# Altium PCB Copy of PCB1.PcbDoc
Units mil, origin at the board's own origin, x right, y up, seen from the top; angles counter-clockwise.
Board outline 6000 x 4000 mil, 10 copper layers (Top Layer 1, Top Layer, Layer 5, Layer 3, Layer 1, Layer 2, Layer 4, Layer 6, Bottom Layer, Bottom Layer 1), stack 48.824 mil thick; 53 components, 189 nets, 458 pads, 0 vias.
Unrouted connection lines stored in the file: 253.
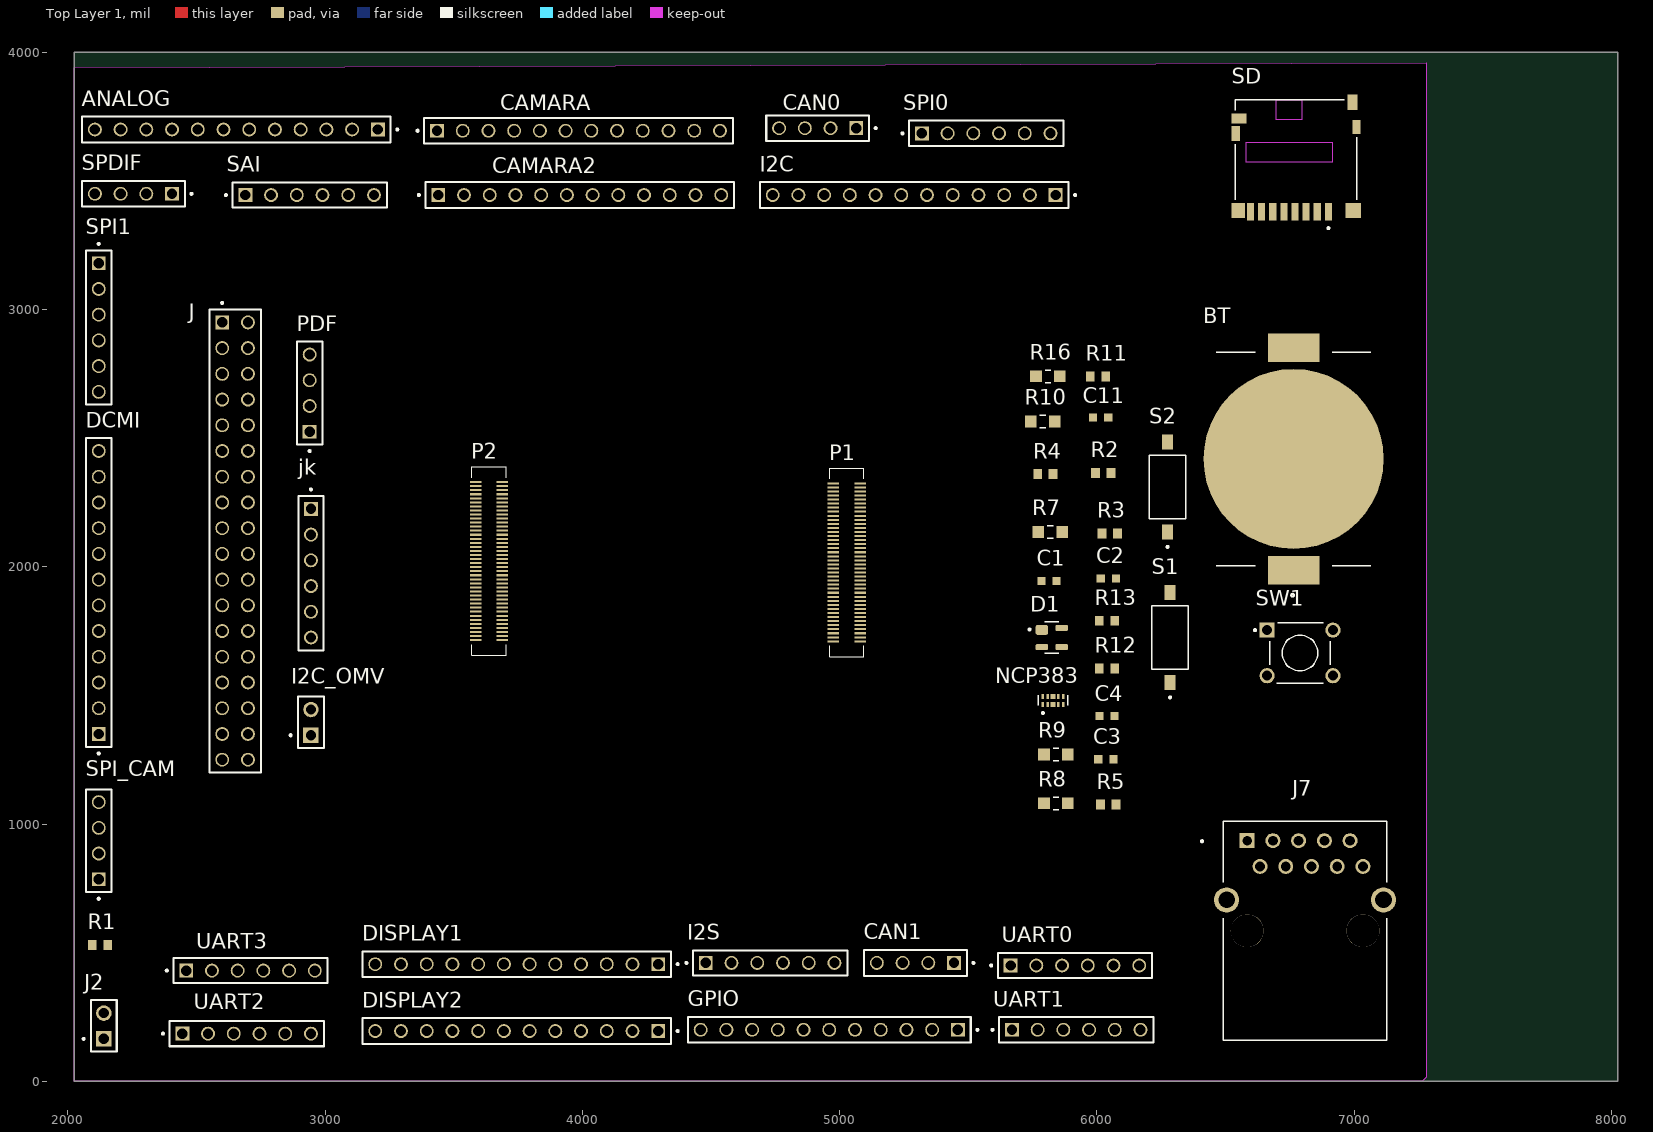
[diagram p0: Top Layer 1 view]
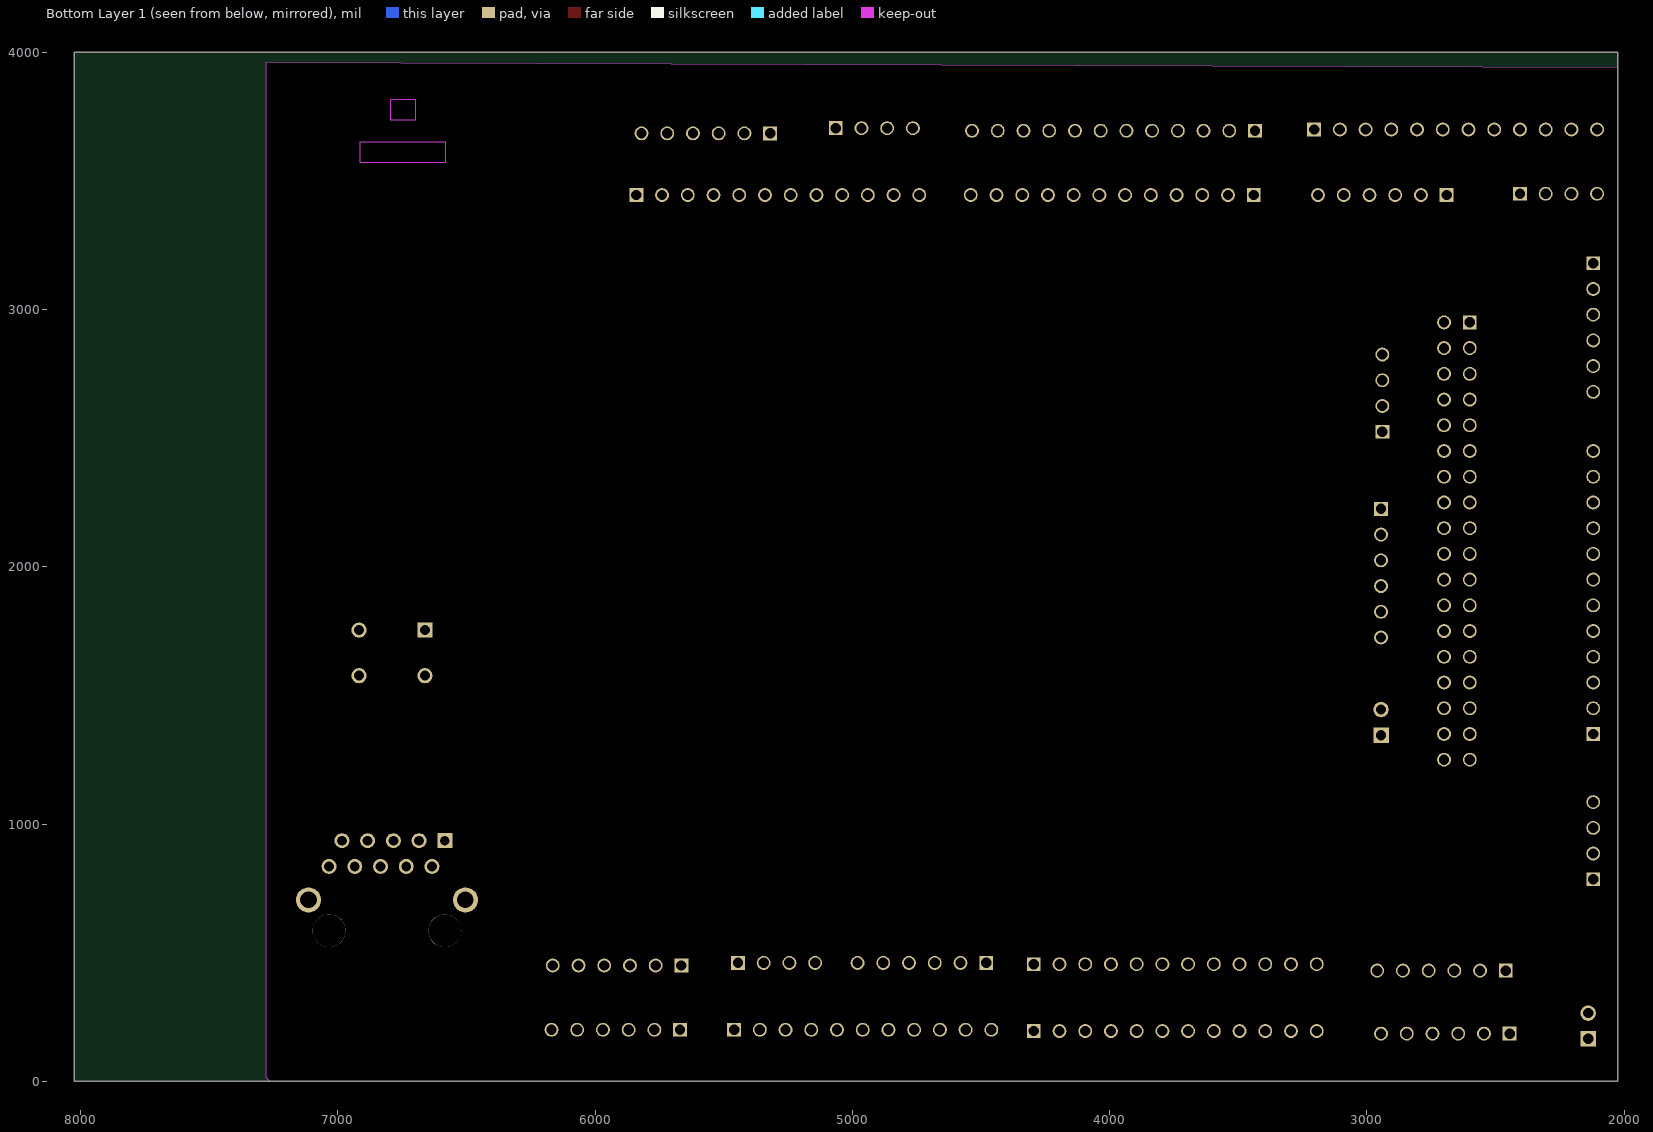
[diagram p1: Bottom Layer 1 view, seen from below]

## Layer stack, top to bottom
Top Solder: solder mask 0.4, Solder Resist, Dk 3.5
Top Layer 1: signal copper 1.378
Dielectric 4: prepreg 2.8, PP-006, Dk 4.1
Top Layer: signal copper 1.4
Dielectric 2: prepreg 2.8, PP-006, Dk 4.1
Layer 5: signal copper 1.378
Dielectric 8: prepreg 2.8, PP-006, Dk 4.1
Layer 3: signal copper 1.378
Dielectric 6: prepreg 2.8, PP-006, Dk 4.1
Layer 1: signal copper 1.378
Dielectric 1: dielectric 12.6, FR-4, Dk 4.8
Layer 2: signal copper 1.378
Dielectric 7: prepreg 2.8, PP-006, Dk 4.1
Layer 4: signal copper 1.378
Dielectric 9: prepreg 2.8, PP-006, Dk 4.1
Layer 6: signal copper 1.378
Dielectric 3: prepreg 2.8, PP-006, Dk 4.1
Bottom Layer: signal copper 1.4
Dielectric 5: prepreg 2.8, PP-006, Dk 4.1
Bottom Layer 1: signal copper 1.378
Bottom Solder: solder mask 0.4, Solder Resist, Dk 3.5

## Board outline
2025,0 8025,0 8025,4000 2025,4000
cut-out: 7280,3960 7280,15 7265,0 2025,0 2025,3940

## Design rules (kind name [scope] priority, off if disabled: settings)
Clearance [All] p1: gap=5 ignorepadtopadclearanceinfootprint=FALSE
DiffPairsRouting [All] p1: maxlimit=10 minlimit=10 mostfreqgap=10 toplayer_minwidth=5 toplayer_maxwidth=15 toplayer_prefwidth=5 midlayer1_minwidth=5 midlayer1_maxwidth=15 midlayer1_prefwidth=5 midlayer2_minwidth=5 midlayer2_maxwidth=15 midlayer2_prefwidth=5 midlayer3_minwidth=5 midlayer3_maxwidth=15 midlayer3_prefwidth=5 midlayer4_minwidth=5 midlayer4_maxwidth=15 midlayer4_prefwidth=5 midlayer5_minwidth=5 midlayer5_maxwidth=15 midlayer5_prefwidth=5 midlayer6_minwidth=5 midlayer6_maxwidth=15 midlayer6_prefwidth=5 midlayer7_minwidth=5 midlayer7_maxwidth=15 midlayer7_prefwidth=5 midlayer8_minwidth=5 midlayer8_maxwidth=15 midlayer8_prefwidth=5 bottomlayer_minwidth=5 bottomlayer_maxwidth=15 bottomlayer_prefwidth=5 maxuncoupledlength=500
PolygonConnect [All] p1: connectstyle=Relief reliefconductorwidth=10 reliefentries=4 polygonreliefangle="90 Angle" airgapwidth=10
RoutingVias [All] p1: holewidth=28 width=50 viastyle="Through Hole" minholewidth=28 minwidth=50 maxholewidth=28 maxwidth=50
SolderMaskExpansion [All] p1: expansion=4 istentingtop=FALSE
Width [All] p1: maxlimit=40 minlimit=5 preferedwidth=10
29 further rules are at their usual default settings.

## Classes and differential pairs
differential pair USB1_D: +USB1_D_P -USB1_D_N
differential pair USB0_D: +USB0_D_P -USB0_D_N
differential pair ETH_D: +ETH_D_P -ETH_D_N
differential pair ETH_C: +ETH_C_P -ETH_C_N
differential pair ETH_B: +ETH_B_P -ETH_B_N
differential pair ETH_A: +ETH_A_P -ETH_A_N
differential pair DSI_D3: +DSI_D3_P -DSI_D3_N
differential pair DSI_D2: +DSI_D2_P -DSI_D2_N
differential pair DSI_D1: +DSI_D1_P -DSI_D1_N
differential pair DSI_D0: +DSI_D0_P -DSI_D0_N
differential pair DSI_CK: +DSI_CK_P -DSI_CK_N
differential pair DS1_D2: +DS1_D2_P -DS1_D2_N
differential pair DS1_CK: +DS1_CK_P -DS1_CK_N
differential pair CK: +CK_P -CK_N
differential pair CAM_D3: +CAM_D3_P -CAM_D3_N
differential pair CAM_D2: +CAM_D2_P -CAM_D2_N
differential pair CAM_D1: +CAM_D1_P -CAM_D1_N
differential pair CAM_D0: +CAM_D0_P -CAM_D0_N

## Components (designator, comment, footprint, x,y, rotation, side; value= is the part's Value field where it differs from the comment)
ANALOG "TSW-112-05-S-S" SAMTEC_TSW-112-05-S-S 3205,3700 r180 top
BT "BK-912-TR" MPD_BK-912-TR 6765,2419.2 r90 top
C1 "885012206071" WCAP-CSGP_885012206071 5814.53,1945 r0 top
C2 "885012206071" WCAP-CSGP_885012206071 6045,1955 r0 top
C3 "885012206071" WCAP-CSGP_885012206071 6035,1251.61 r0 top
C4 "885012206071" WCAP-CSGP_885012206071 6040,1420 r0 top
C11 "885012206071" WCAP-CSGP_885012206071 6015,2580 r0 top
CAMARA "TSW-112-05-S-S" SAMTEC_TSW-112-05-S-S 3435,3695 r0 top
CAMARA2 "TSW-112-05-S-S" SAMTEC_TSW-112-05-S-S 3440,3445 r0 top
CAN0 "TSW-104-24-G-S" SAMTEC_TSW-104-24-G-S 5065,3705 r180 top
CAN1 "TSW-104-24-G-S" SAMTEC_TSW-104-24-G-S 5445,460 r180 top
D1 "PRTR5V0U2X" SOT190P230X110-4N 5825,1725 r0 top
DCMI "TSW-112-05-S-S" SAMTEC_TSW-112-05-S-S 2120,1350 r90 top
DISPLAY1 "TSW-112-05-S-S" SAMTEC_TSW-112-05-S-S 4295,455 r180 top
DISPLAY2 "TSW-112-05-S-S" SAMTEC_TSW-112-05-S-S 4295,195 r180 top
GPIO "MTSW-111-22-T-S-440" SAMTEC_MTSW-111-22-T-S-440 4960,200 r0 top
I2C "TSW-112-05-S-S" SAMTEC_TSW-112-05-S-S 5840,3445 r180 top
I2C_OMV "DW-01-X-X-D-X" SAMTEC_DW-01-X-X-D-X 2945,1395 r0 top
I2S "HTSW-106-07-S-S-LL" SAMTEC_HTSW-106-07-S-S-LL 4730,460 r180 top
J "TSW-118-15-G-D" SAMTEC_TSW-118-15-G-D 2600,2950 r270 top
J2 "DW-01-X-X-D-X" SAMTEC_DW-01-X-X-D-X 2140,215 r0 top
J7 "SS64100-042F" BEL_SS64100-042F 6809.58,585 r0 top
jk "HTSW-106-07-S-S-LL" SAMTEC_HTSW-106-07-S-S-LL 2945,1975 r90 top
NCP383 "SZESD7104MUTAG" DIO_SZESD7104MUTAG 5829.68,1480.75 r90 top
P1 "DF40C-80DS-0.4V(51)" HRS_DF40C-80DS-0.4V(51) 5028.03,2017.09 r90 top
P2 "DF40C-80DS-0.4V(51)" HRS_DF40C-80DS-0.4V(51) 3636.97,2022.09 r90 top
PDF "TSW-104-24-G-S" SAMTEC_TSW-104-24-G-S 2940,2525 r90 top
R1 "CRCW06030000ZSTA" RESC1508X50N 2125.12,530 r0 top
R2 "CRCW06030000ZSTA" RESC1508X50N 6025,2365 r0 top
R3 "CRCW06030000ZSTA" RESC1508X50N 6050,2130 r0 top
R4 "CRCW06030000ZSTA" RESC1508X50N 5800,2360 r0 top
R5 "CRCW06030000ZSTA" RESC1508X50N 6044.88,1075 r0 top
R7 "ERJS06J104V" RES_ERJS06J104V 5818.74,2135 r0 top
R8 "ERJS06J104V" RES_ERJS06J104V 5841.26,1080 r0 top
R9 "ERJS06J104V" RES_ERJS06J104V 5841.26,1270 r0 top
R10 "ERJS06J104V" RES_ERJS06J104V 5790,2565 r0 top
R11 "CRCW06030000ZSTA" RESC1508X50N 6005.12,2740 r0 top
R12 "CRCW06030000ZSTA" RESC1508X50N 6040,1605 r0 top
R13 "CRCW06030000ZSTA" RESC1508X50N 6040.12,1790 r0 top
R16 "ERJS06J104V" RES_ERJS06J104V 5810,2740 r0 top
S1 "KAE01SGGT" SW_KAE01SGGT 6285,1725 r90 top
S2 "KAE01SGGT" SW_KAE01SGGT 6275,2310 r90 top
SAI "HTSW-106-07-S-S-LL" SAMTEC_HTSW-106-07-S-S-LL 2940,3445 r180 top
SD "1140084168" AMPHENOL_1140084168 6774.41,3414.53 r0 top
SPDIF "TSW-104-24-G-S" SAMTEC_TSW-104-24-G-S 2405,3450 r180 top
SPI0 "HTSW-106-07-S-S-LL" SAMTEC_HTSW-106-07-S-S-LL 5570,3685 r180 top
SPI1 "HTSW-106-07-S-S-LL" SAMTEC_HTSW-106-07-S-S-LL 2120,2930 r90 top
SPI_CAM "TSW-104-24-G-S" SAMTEC_TSW-104-24-G-S 2120,785 r90 top
SW1 "1825910-6" SW_1825910-6-4 6790,1665 r0 top
UART0 "HTSW-106-07-S-S-LL" SAMTEC_HTSW-106-07-S-S-LL 5915,450 r180 top
UART1 "HTSW-106-07-S-S-LL" SAMTEC_HTSW-106-07-S-S-LL 5920,200 r180 top
UART2 "HTSW-106-07-S-S-LL" SAMTEC_HTSW-106-07-S-S-LL 2695,185 r180 top
UART3 "HTSW-106-07-S-S-LL" SAMTEC_HTSW-106-07-S-S-LL 2710,430 r180 top

## Footprints (in the part's own frame and the unit in brackets; to place one, negate y for a bottom-side part, rotate by r counter-clockwise, add the part's x,y. Pads: shape width x height; smd on the part's side, far side on the other; paste and mask are expansions set on the pad)
AMPHENOL_1140084168 [mm]
  rect 0.7x1.75 smd: 1(3.2,-0.875) 2(2.1,-0.875) 3(1,-0.875) 4(-0.1,-0.875) 5(-1.2,-0.875) 6(-2.3,-0.875) 7(-3.4,-0.875) 8(-4.5,-0.875)
  rect 1x1.55 smd: 9(5.575,9.925)
  rect 1.45x1 smd: 10(-5.625,8.35)
  rect 1.5x1.5 smd: S1(5.65,-0.75)
  rect 1.3x1.5 smd: S2(-5.7,-0.75)
  rect 0.8x1.4 smd: S3(5.975,7.5)
  rect 0.8x1.5 smd: S4(-5.95,6.85)
  Keep-Out Layer region: 3.6,4 -4.9,4 -4.9,6 3.6,6
  Keep-Out Layer region: 0.55,8.2 -1.95,8.2 -1.95,10.2 0.55,10.2
  silkscreen extent -5.97,-2.6 5.97,10.2, body extent -6.02,-11.5 5.99,0.15
BEL_SS64100-042F [mm]
  rect 1.478x1.478 hole 0.97: 1(-5.715,8.89)
  round 1.478 hole 0.97: 2(-4.445,6.35) 3(-3.175,8.89) 4(-1.905,6.35) 5(-0.635,8.89) 6(0.635,6.35) 7(1.905,8.89) 8(3.175,6.35) 9(4.445,8.89) 10(5.715,6.35)
  round 2.475 hole 1.65: S1(-7.745,3.05) S2(7.745,3.05)
  round 3.25 hole 3.25 unplated: ""(-5.715,0) ""(5.715,0)
  silkscreen extent -10.27,-10.8 8.07,10.79, body extent -8,0 8,21.03, height 13.67
DIO_SZESD7104MUTAG [mm]
  rect 0.5x0.25 smd mask+0.05: 1(-0.4,1) 2(-0.4,0.5) 4(-0.4,-0.5) 5(-0.4,-1) 6(0.4,-1) 7(0.4,-0.5) 9(0.4,0.5) 10(0.4,1)
  rect 0.5x0.45 smd mask+0.05: 3(-0.4,0) 8(0.4,0)
  silkscreen extent -1.35,-1.44 0.5,1.44, body extent -0.5,-1.25 0.5,1.25, height 0.55
HRS_DF40C-80DS-0.4V(51) [mm]
  rect 0.2x1.14 smd: 1(-7.8,-1.32) 2(-7.8,1.32) 3(-7.4,-1.32) 4(-7.4,1.32) 5(-7,-1.32) 6(-7,1.32) 7(-6.6,-1.32) 8(-6.6,1.32) 9(-6.2,-1.32) 10(-6.2,1.32) 11(-5.8,-1.32) 12(-5.8,1.32) 13(-5.4,-1.32) 14(-5.4,1.32) 15(-5,-1.32) 16(-5,1.32) 17(-4.6,-1.32) 18(-4.6,1.32) 19(-4.2,-1.32) 20(-4.2,1.32) 21(-3.8,-1.32) 22(-3.8,1.32) 23(-3.4,-1.32) 24(-3.4,1.32) 25(-3,-1.32) 26(-3,1.32) 27(-2.6,-1.32) 28(-2.6,1.32) 29(-2.2,-1.32) 30(-2.2,1.32) 31(-1.8,-1.32) 32(-1.8,1.32) 33(-1.4,-1.32) 34(-1.4,1.32) 35(-1,-1.32) 36(-1,1.32) 37(-0.6,-1.32) 38(-0.6,1.32) 39(-0.2,-1.32) 40(-0.2,1.32) 41(0.2,-1.32) 42(0.2,1.32) 43(0.6,-1.32) 44(0.6,1.32) 45(1,-1.32) 46(1,1.32) 47(1.4,-1.32) 48(1.4,1.32) 49(1.8,-1.32) 50(1.8,1.32) 51(2.2,-1.32) 52(2.2,1.32) 53(2.6,-1.32) 54(2.6,1.32) 55(3,-1.32) 56(3,1.32) 57(3.4,-1.32) 58(3.4,1.32) 59(3.8,-1.32) 60(3.8,1.32) 61(4.2,-1.32) 62(4.2,1.32) 63(4.6,-1.32) 64(4.6,1.32) 65(5,-1.32) 66(5,1.32) 67(5.4,-1.32) 68(5.4,1.32) 69(5.8,-1.32) 70(5.8,1.32) 71(6.2,-1.32) 72(6.2,1.32) 73(6.6,-1.32) 74(6.6,1.32) 75(7,-1.32) 76(7,1.32) 77(7.4,-1.32) 78(7.4,1.32) 79(7.8,-1.32) 80(7.8,1.32)
  silkscreen extent -9.3,-1.69 9.3,1.69
MPD_BK-912-TR [mm]
  rect 2.79x5.08 smd: 1(-10.985,0) 2(10.985,0)
  round 17.78 smd: 3(0,0)
  silkscreen extent -13.59,-7.62 10.54,7.62
RES_ERJS06J104V [mm]
  rect 1.15x1.15 smd: 1(-1.175,0) 2(1.175,0)
  silkscreen extent -0.28,-0.62 0.28,0.62
RESC1508X50N [mm]
  rect 0.86x0.98 smd: 1(-0.765,0) 2(0.765,0)
SAMTEC_DW-01-X-X-D-X [mm]
  rect 1.53x1.53 / inner round 1.53 / far side rect 1.53x1.53 hole 1.02: 01(0,-1.27)
  round 1.53 hole 1.02: 02(0,1.27)
  silkscreen extent -2.1,-2.54 1.27,2.54
SAMTEC_HTSW-106-07-S-S-LL [mm]
  rect 1.37x1.37 / inner round 1.37 / far side rect 1.37x1.37 hole 1.02: 01(6.35,0)
  round 1.37 hole 1.02: 02(3.81,0) 03(1.27,0) 04(-1.27,0) 05(-3.81,0) 06(-6.35,0)
  silkscreen extent -7.62,-1.24 8.37,1.24
SAMTEC_MTSW-111-22-T-S-440 [mm]
  rect 1.37x1.37 / inner round 1.37 / far side rect 1.37x1.37 hole 1.02: 01(12.7,0)
  round 1.37 hole 1.02: 02(10.16,0) 03(7.62,0) 04(5.08,0) 05(2.54,0) 06(0,0) 07(-2.54,0) 08(-5.08,0) 09(-7.62,0) 10(-10.16,0) 11(-12.7,0)
  silkscreen extent -13.97,-1.27 14.72,1.27
SAMTEC_TSW-104-24-G-S [mm]
  rect 1.37x1.37 hole 1.02: 01(0,0)
  round 1.37 hole 1.02: 02(2.54,0) 03(5.08,0) 04(7.62,0)
  silkscreen extent -2.02,-1.27 8.89,1.27
SAMTEC_TSW-112-05-S-S [mm]
  rect 1.37x1.37 hole 1.02: 01(0,0)
  round 1.37 hole 1.02: 02(2.54,0) 03(5.08,0) 04(7.62,0) 05(10.16,0) 06(12.7,0) 07(15.24,0) 08(17.78,0) 09(20.32,0) 10(22.86,0) 11(25.4,0) 12(27.94,0)
  silkscreen extent -2.02,-1.27 29.21,1.27
SAMTEC_TSW-118-15-G-D [mm]
  rect 1.37x1.37 hole 1.02: 01(0,0)
  round 1.37 hole 1.02: 02(0,2.54) 03(2.54,0) 04(2.54,2.54) 05(5.08,0) 06(5.08,2.54) 07(7.62,0) 08(7.62,2.54) 09(10.16,0) 10(10.16,2.54) 11(12.7,0) 12(12.7,2.54) 13(15.24,0) 14(15.24,2.54) 15(17.78,0) 16(17.78,2.54) 17(20.32,0) 18(20.32,2.54) 19(22.86,0) 20(22.86,2.54) 21(25.4,0) 22(25.4,2.54) 23(27.94,0) 24(27.94,2.54) 25(30.48,0) 26(30.48,2.54) 27(33.02,0) 28(33.02,2.54) 29(35.56,0) 30(35.56,2.54) 31(38.1,0) 32(38.1,2.54) 33(40.64,0) 34(40.64,2.54) 35(43.18,0) 36(43.18,2.54)
  silkscreen extent -2.02,-1.27 44.45,3.81
SOT190P230X110-4N [mm]
  rrect50% 1.26x0.99 smd: 1(-0.98,0.75)
  rrect50% 1.26x0.59 smd: 2(-0.98,-0.95) 3(0.98,-0.95) 4(0.98,0.95)
  silkscreen extent -2.3,-1.56 0.7,1.56, body extent -1.15,-1.45 1.15,1.45, height 1.1
SW_1825910-6-4 [mm]
  rect 1.498x1.498 / inner round 1.498 / far side rect 1.498x1.498 hole 0.99: 1(-3.25,2.25)
  round 1.498 hole 0.99: 2(3.25,2.25) 3(-3.25,-2.25) 4(3.25,-2.25)
  silkscreen extent -4.54,-3 3,3, body extent -3,-3.9 3,3.9, height 5.01
SW_KAE01SGGT [mm]
  rect 1.5x1.1 smd: 1(-4.45,0) 2(4.45,0)
  silkscreen extent -6.01,-1.79 3.15,1.79, body extent -4.9,-1.79 4.9,1.79, height 3.13
WCAP-CSGP_885012206071 [mm]
  rect 0.8x0.8 smd: 1(-0.75,0) 2(0.75,0)

## Part data
ANALOG CAMARA CAMARA2 DCMI DISPLAY1 DISPLAY2 GPIO I2C I2S J jk R7 R8 R9 R10 R16 SAI SPI0 SPI1 UART0 UART1 UART2 UART3: Package=None, Availability=Unavailable, Price=None
  ANALOG CAMARA CAMARA2 DCMI DISPLAY1 DISPLAY2 I2C: MP=TSW-112-05-S-S
  GPIO: MP=MTSW-111-22-T-S-440
  I2S jk SAI SPI0 SPI1 UART0 UART1 UART2 UART3: MP=HTSW-106-07-S-S-LL
  J: MF=Samtec, MP=TSW-118-15-G-D
  R7 R8 R9 R10 R16: MP=ERJS06J104V
BT: "Battery Retainer Coin, 20.0mm 1 Cell SMD _SMT_ Tab", Package="MSOP-12 MPD", Digi-Key_Part_Number=BK-912-CT-ND, Digi-Key_Purchase_URL=https://www.digikey.com/product-detail/en/mpd-memory-protection-devices/BK-912-TR/BK-912-CT-ND/2647828?utm_source=snapeda&utm_medium=aggregator&utm_campaign=symbol, MF="MPD _Memory", MP=BK-912-TR, SnapEDA_Link=https://www.snapeda.com/parts/BK-912-TR/MPD%20%28Memory%20Protection%20Devices%29/view-part/229797/?ref=snap
C1 C2 C3 C4 C11: "WCAP-CSGP General Purpose MLCC; SMT 0603; X7R; 100nF 10%; 25V; -55C to +125C; Tech. PN X7R0603104K025DFCT10000", Package="0603 Wurth Electronics", Availability=Warning, Check_prices=https://www.snapeda.com/parts/885012206071/Wurth%20Electronics%20Inc/view-part/4217095/?ref=eda, MF="Wurth Electronics Inc", MP=885012206071, Price=None, Purchase-URL=https://pricing.snapeda.com/search/part/885012206071/?ref=eda, SnapEDA_Link=https://www.snapeda.com/parts/885012206071/Wurth%20Electronics%20Inc/view-part/4217095/?ref=snap
CAN0 CAN1 PDF SPDIF SPI_CAM: "Connector Header Through Hole 4 position 0.100 (2.54mm)", Package=None, Availability=Unavailable, MF=Samtec, MP=TSW-104-24-G-S, Price=None, SnapEDA_Link=https://www.snapeda.com/parts/TSW-104-24-G-S/Samtec/view-part/3451889/?ref=snap
D1: "Nexperia PRTR5V0U2X,215, Dual-Element Uni-Directional TVS Diode, 4-Pin SOT-143B", Package="TO-253-4 Nexperia USA Inc.", Availability="In Stock", Check_prices=https://www.snapeda.com/parts/PRTR5V0U2X/NXP+Semiconductors/view-part/?ref=eda, MF="NXP Semiconductors", MP=PRTR5V0U2X, Price=None, Purchase-URL=https://pricing.snapeda.com/search/part/PRTR5V0U2X/?ref=eda, SnapEDA_Link=https://www.snapeda.com/parts/PRTR5V0U2X/NXP+Semiconductors/view-part/?ref=snap
I2C_OMV J2: "2 Position Header Spacer Connector Tin Through Hole", Package=None, Check_prices=https://www.snapeda.com/parts/DW-01-15-T-D-330/Samtec/view-part/?ref=eda, MF=Samtec, MP=DW-01-15-T-D-330, SnapEDA_Link=https://www.snapeda.com/parts/DW-01-15-T-D-330/Samtec/view-part/?ref=snap
J7: "Modular Jack", Package=None, Check_prices=https://www.snapeda.com/parts/SS64100-042F/Stewart%20Connector/view-part/4629115/?ref=eda, Digi-Key_Part_Number=380-1439-ND, MF="Stewart Connector", MP=SS64100-042F, Purchase-URL=https://pricing.snapeda.com/search/part/SS64100-042F/?ref=eda, SnapEDA_Link=https://www.snapeda.com/parts/SS64100-042F/Stewart%20Connector/view-part/4629115/?ref=snap
NCP383: "ESD Suppressor Diode TVS Bi-Dir 5V 10Vc Automotive 10-Pin UDFN T/R", Package="UDFN-10 ON Semiconductor", Check_prices=https://www.snapeda.com/parts/SZESD7104MUTAG/Onsemi/view-part/?ref=eda, MF=onsemi, MP=SZESD7104MUTAG, SnapEDA_Link=https://www.snapeda.com/parts/SZESD7104MUTAG/Onsemi/view-part/?ref=snap
P1 P2: "80 Position Connector Receptacle, Center Strip Contacts Surface Mount Gold", Package=None, Digi-Key_Part_Number=H11633CT-ND, Digi-Key_Purchase_URL=https://www.digikey.com/product-detail/en/hirose-electric-co-ltd/DF40C-80DS-0.4V_51_/H11633CT-ND/1969512?utm_source=snapeda&utm_medium=aggregator&utm_campaign=symbol, MF=Hirose, MP=DF40C-80DS-0.4V_51_, SnapEDA_Link=https://www.snapeda.com/parts/DF40C-80DS-0.4V%2851%29/Hirose%20Electric%20Co%20Ltd/view-part/175723/?ref=snap
R1 R2 R3 R4 R5 R11 R12 R13: "RES SMD 0.0OHM JUMPER 1/10W 0603", Package=None, Availability=Unavailable, MP=CRCW06030000ZSTA, Price=None
S1 S2: "Dip Switch SPST 1 Position Surface Mount Slide (Standard) Actuator 25mA 24VDC", Package=None, Availability="In Stock", Check_prices=https://www.snapeda.com/parts/KAE01SGGT/E-Switch/view-part/?ref=eda, MF=E-Switch, MP=KAE01SGGT, Price=None, Purchase-URL=https://pricing.snapeda.com/search/part/KAE01SGGT/?ref=eda, SnapEDA_Link=https://www.snapeda.com/parts/KAE01SGGT/E-Switch/view-part/?ref=snap
SD: "10 (8 + 2) Position Card Connector Secure Digital - microSDâ„¢ Surface Mount, Right Angle Gold", Package=None, Availability="In Stock", Check_prices=https://www.snapeda.com/parts/1140084168/Amphenol+FCI/view-part/?ref=eda, MF="Amphenol ICC", MP=1140084168, Price=None, Purchase-URL=https://pricing.snapeda.com/search/part/1140084168/?ref=eda, SnapEDA_Link=https://www.snapeda.com/parts/1140084168/Amphenol+FCI/view-part/?ref=snap
SW1: "Switch Push Button OFF (ON) SPST Round Button 0.05A 24VDC Momentary Contact PC Pins Thru-Hole", Package=None, Check_prices=https://www.snapeda.com/parts/1825910-6/TE+Connectivity+ALCOSWITCH+Switches/view-part/?ref=eda, Digi-Key_Part_Number=450-1650-ND, MF="TE Connectivity", MP=1825910-6, Purchase-URL=https://pricing.snapeda.com/search/part/1825910-6/?ref=eda, SnapEDA_Link=https://www.snapeda.com/parts/1825910-6/TE+Connectivity+ALCOSWITCH+Switches/view-part/?ref=snap

## Nets (pads, with @x,y where several pads share a name; then routed paths per layer and width w, separated by ;. In a path a pad name is that pad's centre, name@x,y a point inside that pad or via, vN(x,y) a via of type N, cw(c..) or ccw(c..) an arc to the next point about the centre after c; other vN are vias at no path point)
+5V: CAN0.01 CAN1.01 J2.01 NCP383.2 NCP383.3
A0: ANALOG.01 P2.73
A1: ANALOG.02 P2.75
A2: ANALOG.03 P2.77
A3: ANALOG.04 P2.79
A4: ANALOG.05 P2.74
A5: ANALOG.06 P2.76
A6: ANALOG.07 P2.78
A7: ANALOG.08 P2.80
A8: ANALOG.09
A9: ANALOG.10
AREF_N: P2.72
AREF_P: P2.71
BOOT: S1.1
BT_SEL: S2.1
CAM_D0_N: CAMARA2.12 CAMARA.12 P2.16
CAM_D0_P: CAMARA2.11 CAMARA.11 P2.14
CAM_D1_N: CAMARA2.10 CAMARA.10 P2.12
CAM_D1_P: CAMARA2.09 CAMARA.09 P2.10
CAM_D2_N: CAMARA2.08 CAMARA.08 P2.8
CAM_D2_P: CAMARA2.07 CAMARA.07 P2.6
CAM_D3_N: CAMARA2.06 CAMARA.06 P2.4
CAM_D3_P: CAMARA2.05 CAMARA.05 P2.2
CAN0_RX: CAN0.03 P1.52
CAN0_TX: CAN0.02 P1.50
CAN1_RX: CAN1.03 P1.51
CAN1_TX: CAN1.02 P1.49
CK: P1.66 PDF.01
CK_N: CAMARA2.04 CAMARA.04 P2.19 P2.20
CK_OMV: J.13 SPI_CAM.02
CK_P: CAMARA2.03 CAMARA.03 P2.17 P2.18
CS_OMV: J.11 R1.2
D0: P1.68 PDF.02
D1: P1.70 PDF.03
D_N: D1.3 jk.02
DCMI_D0: DCMI.09 J.31
DCMI_D1: DCMI.08 J.29
DCMI_D2: DCMI.07 J.35
DCMI_D3: DCMI.06 J.28
DCMI_D4: DCMI.05 J.26
DCMI_D5: DCMI.04 J.33
DCMI_D6: DCMI.03 J.24
DCMI_D7: DCMI.02 J.22
DCMI_HS: DCMI.12 J.18
DCMI_PCLK: DCMI.11 J.14
DCMI_VS: DCMI.10 J.16
DS1_CK_N: P1.20
DS1_CK_P: P1.18
DS1_D0_P: P1.14
DS1_D1_P: P1.10
DS1_D2_N: P1.8
DS1_D2_P: P1.6
DS1_D3_P: P1.2
DSI_CK_N: DISPLAY1.10 DISPLAY2.10
DSI_CK_P: DISPLAY1.09 DISPLAY2.09
DSI_D0_N: DISPLAY1.08 DISPLAY2.08 P1.16
DSI_D0_P: DISPLAY1.07 DISPLAY2.07
DSI_D1_N: DISPLAY1.06 DISPLAY2.06 P1.12
DSI_D1_P: DISPLAY1.05 DISPLAY2.05
DSI_D2_N: DISPLAY1.04 DISPLAY2.04
DSI_D2_P: DISPLAY1.03 DISPLAY2.03
DSI_D3_N: DISPLAY1.02 DISPLAY2.02 P1.4
DSI_D3_P: DISPLAY1.01 DISPLAY2.01
ETH_A_N: J7.2 P1.3
ETH_A_P: J7.1 P1.1
ETH_B_N: J7.4 P1.7
ETH_B_P: J7.3 P1.5
ETH_C_N: J7.8 P1.11
ETH_C_P: J7.7 P1.9
ETH_D_N: J7.10 P1.15
ETH_D_P: J7.9 P1.13
ETH_LED1: P1.17
ETH_LED2: P1.19
GND: ANALOG.11 ANALOG.12 BT.3 C1.1 C3.1 C4.1 C11.1 CAMARA.01 CAN0.04 CAN1.04 DISPLAY1.11 DISPLAY1.12 DISPLAY2.11 DISPLAY2.12 GPIO.09 GPIO.10 GPIO.11 I2C.02 I2C.06 I2C.10 I2S.06 J2.02 J7.S1 J7.S2 J.05 J.19 J.27 jk.04 NCP383.1 P1.22 P1.31 P1.42 P1.47 P1.54 P2.24 P2.33 P2.44 P2.57 P2.70 PDF.04 R7.1 R9.2 R10.2 R16.1 SAI.01 SD.6 SD.10 SD.S1 SD.S2 SD.S3 SD.S4 SPDIF.03 SPDIF.04 SPI0.06 SPI1.06 SW1.1 SW1.2 UART0.06 UART1.06 UART2.06 UART3.06
GPIO_0: GPIO.02 P2.46 R2.1
GPIO_1: GPIO.03 P2.48 R3.1
GPIO_2: GPIO.04 P2.50
GPIO_3: GPIO.05 P2.52 R4.1
GPIO_4: GPIO.06 P2.54
GPIO_5: GPIO.07 P2.56
GPIO_6: GPIO.08 P2.58
HS: CAMARA2.02 CAMARA.02 P2.22
I2S_CK: I2S.02 P1.56
I2S_SDI: I2S.04 P1.60
I2S_SDO: I2S.05 P1.62
I2S_WS: I2S.03 P1.58
JTAG_RESET: P1.73
JTAG_TCK/SCK: P1.77
JTAG_TD0/SWO: P1.79
JTAG_TMS/SWD: P1.75
LICELL: BT.1 BT.2 P2.7
MISO_OMV: J.15 SPI_CAM.03
MOSI_OMV: J.17 SPI_CAM.04
NetC2_1: C2.1 jk.05 jk.06
NetC3_2: C3.2 J7.5 R12.2
NetC4_2: C4.2 J7.6 R13.2
NetD1_1: D1.1 R16.2
NetD1_2: D1.2 jk.03
NetJ_04: J.04 R5.1
NetJ_21: J.21 R2.2
NetJ_23: J.23 R3.2
NetJ_25: J.25 R4.2
NetNCP383_7: NCP383.7 R9.1 R10.1
NetP1_72: P1.72
NetP2_1: P2.1
NetP2_3: P2.3
NetP2_5: P2.5
NetR1_1: R1.1 SPI_CAM.01
NetR11_1: R11.1 SD.4
PWM_0: J.12 P2.59
PWM_1: P2.61
PWM_2: P2.63
PWM_3: P2.65
PWM_4: P2.67
PWM_5: P2.60
PWM_6: P2.62
PWM_7: P2.64
PWM_8: P2.66
PWM_9: P2.68
PWRON: SW1.3 SW1.4
RST: P2.21
RX: P1.76 SPDIF.02
RX_N: P2.15
RX_P: P2.13
SAI_CK: P2.49 SAI.05
SAI_D0: P2.53 SAI.03
SAI_D1: P2.55 SAI.02
SAI_FS: P2.51 SAI.04
SCL0: I2C.04 P1.46
SCL1: I2C.08 P1.45
SCL2: I2C.12 P2.47
SCL_OMV: I2C_OMV.02 J.32
SDA0: I2C.03 P1.44
SDA1: I2C.07 P1.43
SDA2: I2C.11 P2.45
SDA_OMV: I2C_OMV.01 J.34
SDC_CD: P1.67 SD.9
SDC_CLK: P1.55 SD.5
SDC_CMD: P1.57 SD.3
SDC_D0: P1.59 SD.7
SDC_D1: P1.61 SD.8
SDC_D2: P1.63 SD.1
SDC_D3: P1.65 SD.2
SDC_RST: P1.71
SDC_WP: P1.69
SPI0_CK: P2.37 SPI0.03
SPI0_CS: P2.35 SPI0.02
SPI0_MISO: P2.39 SPI0.04
SPI0_MOSI: P2.41 SPI0.05
SPI1_CK: P2.38 SPI1.03
SPI1_CS: P2.36 SPI1.02
SPI1_MISO: P2.40 SPI1.04
SPI1_MOSI: P2.42 SPI1.05
TDI: P1.80
TRST: P1.78
TX: P1.74 SPDIF.01
TX_N: P2.11
TX_P: P2.9
UART0_CTS: P1.40 UART0.05
UART0_RTS: P1.38 UART0.04
UART0_RX: P1.36 UART0.03
UART0_TX: P1.34 UART0.02
UART1_CTS: P1.39 UART1.05
UART1_RTS: P1.37 UART1.04
UART1_RX: P1.35 UART1.03
UART1_TX: P1.33 UART1.02
UART2_CTS: P2.32 UART2.05
UART2_RTS: P2.30 UART2.04
UART2_RX: P2.28 UART2.03
UART2_TX: P2.26 UART2.02
UART3_CTS: P2.31 UART3.05
UART3_RTS: P2.29 UART3.04
UART3_RX: P2.27 UART3.03
UART3_TX: P2.25 UART3.02
USB0_D_N: P1.28
USB0_D_P: P1.26
USB0_ID: P1.30
USB0_VBUS: P1.24
USB1_D_N: P1.27
USB1_D_P: P1.25
USB1_ID: P1.29
USB1_VBUS: P1.23
USBA_VBUS_EN: NCP383.4 R7.2
USBA_VBUS_FLAG: NCP383.10 R8.1
VBUS: C1.2 D1.4 jk.01 NCP383.9
VCC: GPIO.01 I2C.01 I2C.05 I2C.09 I2S.01 J.02 J.10 J.20 J.30 J.36 P2.23 P2.34 P2.43 P2.69 R8.2 R12.1 R13.1 S1.2 S2.2 SAI.06 SPI0.01 SPI1.01 UART0.01 UART1.01 UART2.01 UART3.01
VDD_SD: R11.2
VIN: P1.21 P1.32 P1.41 P1.48
VSYS: P1.53 P1.64
pads on no net: C2.2 C11.2 CAMARA2.01 DCMI.01 J7. J.01 J.03 J.06 J.07 J.08 J.09 NCP383.5 NCP383.6 NCP383.8 R5.2